# Altium PCB Sensorboard_PCB_layout.pcbdoc
Units mm, origin at the board's own origin, x right, y up, seen from the top; angles counter-clockwise.
Board outline 110.65 x 71.67 mm, 2 copper layers (Top Layer, Bottom Layer); 41 components, 79 nets, 171 pads, 20 vias.
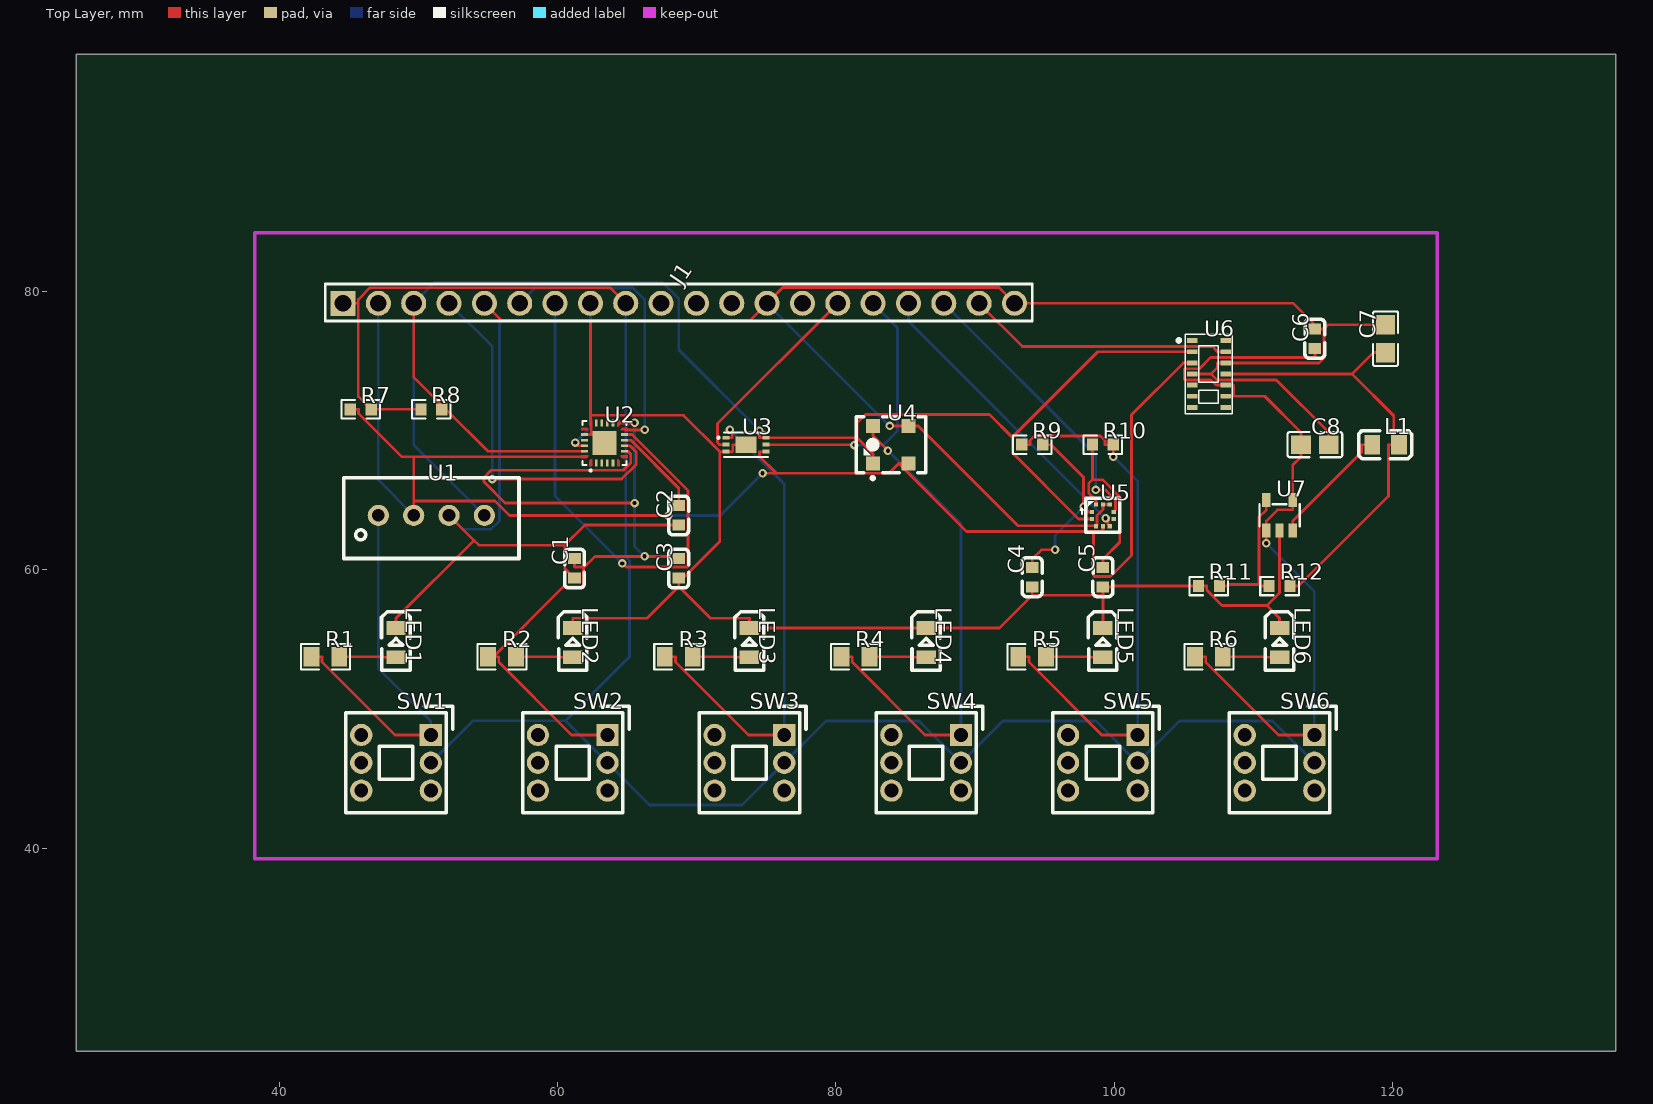
[diagram p0: Top Layer view]
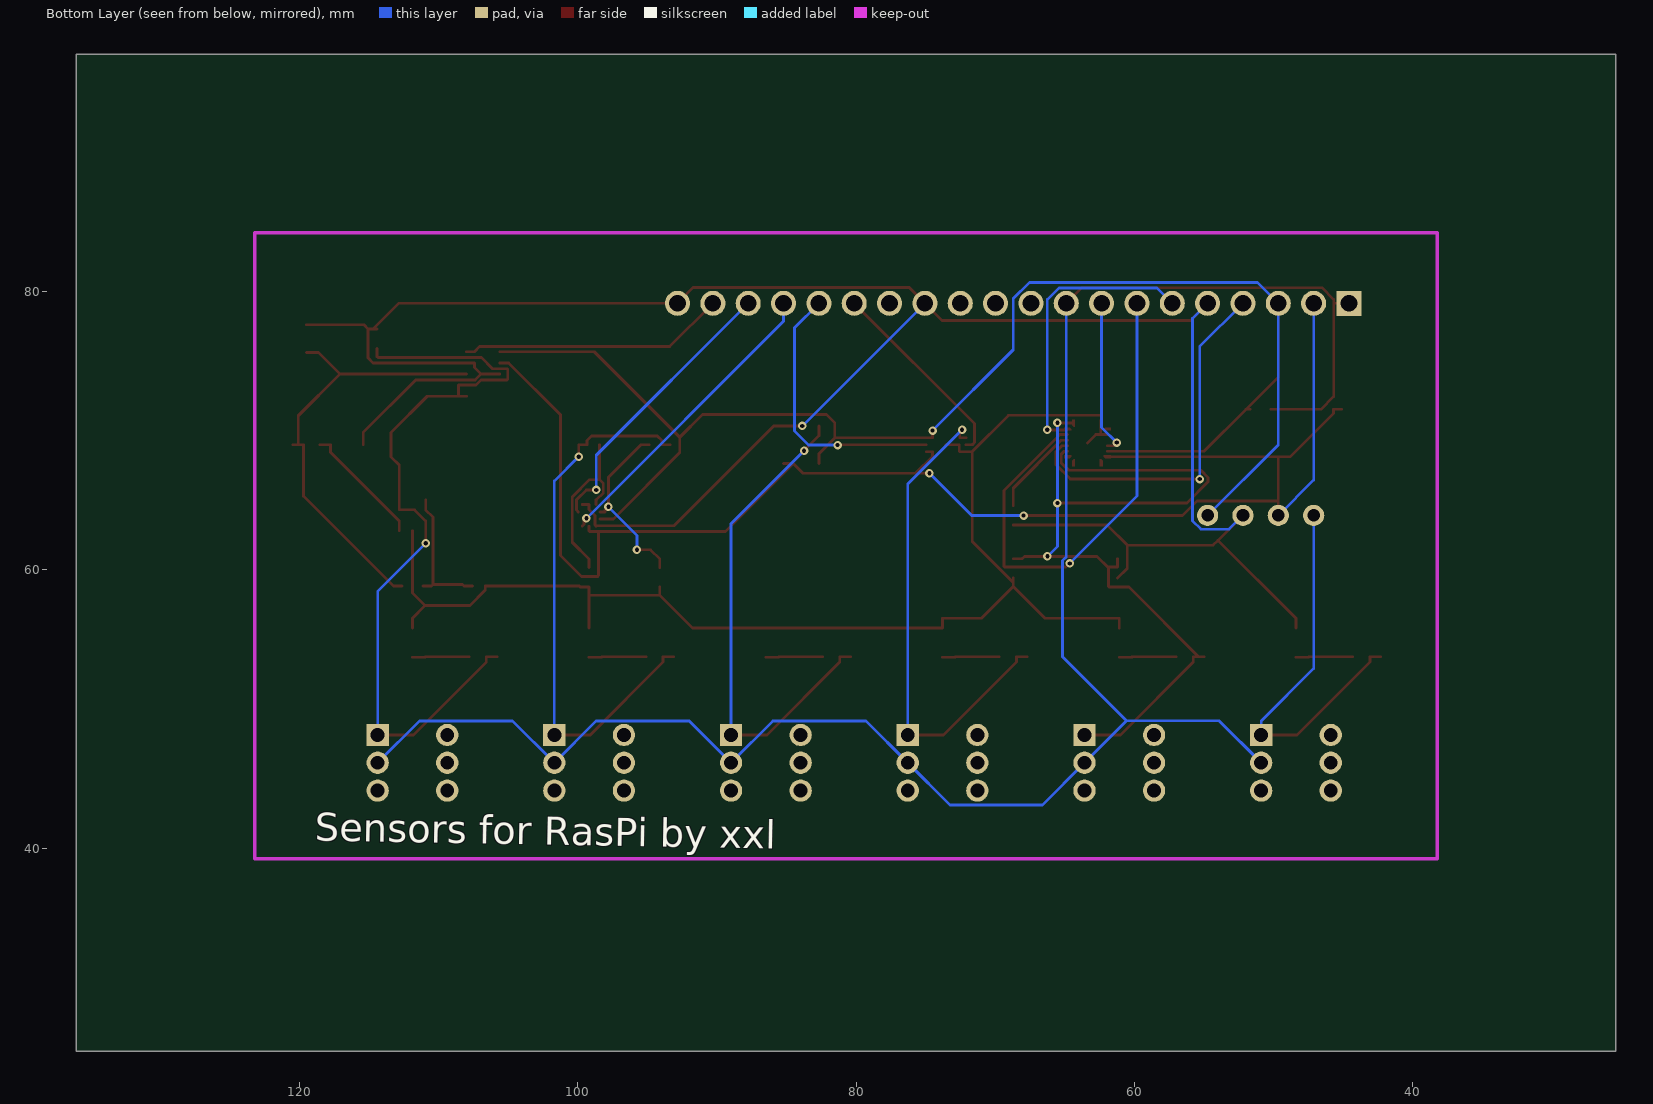
[diagram p1: Bottom Layer view, seen from below]

## Layer stack, top to bottom
Top Layer: signal copper (thickness not stored)
Dielectric: dielectric 0.32, FR-4, Dk 4.8
Bottom Layer: signal copper (thickness not stored)

## Board outline
136.054,25.4 25.4,25.4 25.4,97.072 136.054,97.072

## Components (designator, comment, footprint, x,y, rotation, side; value= is the part's Value field where it differs from the comment)
C1 "100nF" C0603 61.214,60.115 r90 top
C2 "100nF" C0603 68.707,63.925 r90 top
C3 "10nF" C0603 68.707,60.115 r90 top
C4 "100nF" C0603 94.107,59.48 r270 top
C5 "100nF" C0603 99.187,59.48 r270 top
C6 "100nF" C0603 114.427,76.625 r90 top
C7 "10uF" C0805 119.507,76.625 r90 top
C8 "10uF" C0805 114.427,69.005 r180 top
J1 "Header-Male-2.54_1x20" HDR-TH_20P-P2.54-V-M-1 68.707,79.165 r0 top
L1 "2.2uH" L0805 119.507,69.005 r0 top
LED1 "FC-2012HRK-620D" LED0805-R-RD 48.387,54.781 r270 top
LED2 "FC-2012HRK-620D" LED0805-R-RD 61.087,54.781 r270 top
LED3 "FC-2012HRK-620D" LED0805-R-RD 73.787,54.781 r270 top
LED4 "FC-2012HRK-620D" LED0805-R-RD 86.487,54.781 r270 top
LED5 "FC-2012HRK-620D" LED0805-R-RD 99.187,54.781 r270 top
LED6 "FC-2012HRK-620D" LED0805-R-RD 111.887,54.781 r270 top
R1 "68Ω" R0805 43.307,53.765 r0 top
R2 "68Ω" R0805 56.007,53.765 r0 top
R3 "68Ω" R0805 68.707,53.765 r0 top
R4 "68Ω" R0805 81.407,53.765 r0 top
R5 "68Ω" R0805 94.107,53.765 r0 top
R6 "68Ω" R0805 106.807,53.765 r0 top
R7 "3.3kΩ" R0603 45.847,71.545 r0 top
R8 "3.3kΩ" R0603 50.927,71.545 r0 top
R9 "10Ω" R0603 94.107,69.005 r0 top
R10 "10Ω" R0603 99.187,69.005 r0 top
R11 "120kΩ" R0603 106.807,58.845 r0 top
R12 "240kΩ" R0603 111.887,58.845 r0 top
SW1 "XKB7070-Z" SW-TH_6P-L7.0-W7.0-P2.00 48.387,46.145 r0 top
SW2 "XKB7070-Z" SW-TH_6P-L7.0-W7.0-P2.00 61.087,46.145 r0 top
SW3 "XKB7070-Z" SW-TH_6P-L7.0-W7.0-P2.00 73.787,46.145 r0 top
SW4 "XKB7070-Z" SW-TH_6P-L7.0-W7.0-P2.00 86.487,46.145 r0 top
SW5 "XKB7070-Z" SW-TH_6P-L7.0-W7.0-P2.00 99.187,46.145 r0 top
SW6 "XKB7070-Z" SW-TH_6P-L7.0-W7.0-P2.00 111.887,46.145 r0 top
U1 "DHT20" SENSOR-TH_DHT20 50.927,63.925 r0 top
U2 "MPU6500" QFN-24_L3.0-W3.0-P0.40-BL-EP 63.373,69.132 r0 top
U3 "BH1750FVI-TR" WSOF-6_L2.6-W1.6-P0.50-TL-EP 73.533,69.005 r0 top
U4 "AGS10" SENSOR-SMD_AGS10 83.947,69.005 r0 top
U5 "BMP581" LGA-10_L2.0-W2.0-P0.50-TL_BMP581 99.187,63.925 r0 top
U6 "MAX30102EFD+T_C6454833" OESIP-14_L5.6-W3.3-P0.80-TL 106.807,74.085 r0 top
U7 "ZD8028IB5TR" SOT-23-5_L2.9-W1.6-P0.95-LS2.9-BL 111.887,63.925 r0 top

## Footprints (in the part's own frame and the unit in brackets; to place one, negate y for a bottom-side part, rotate by r counter-clockwise, add the part's x,y. Pads: shape width x height; smd on the part's side, far side on the other; paste and mask are expansions set on the pad)
C0603 [mm]
  rect 0.8x0.9 smd paste+0 mask+0.051: 1(-0.7,0) 2(0.7,0)
  silkscreen extent -1.41,-0.71 1.39,0.72
C0805 [mm]
  rect 1.41x1.35 smd paste-100 mask+0.051: 1(-1,0) 2(1,0)
  silkscreen extent -1.96,-0.9 1.96,0.9
HDR-TH_20P-P2.54-V-M-1 [mm]
  rect 1.8x1.8 hole 1.2 paste+0 mask+0.051: 1(-24.13,0)
  round 1.8 hole 1.2 paste+0 mask+0.051: 2(-21.59,0) 3(-19.05,0) 4(-16.51,0) 5(-13.97,0) 6(-11.43,0) 7(-8.89,0) 8(-6.35,0) 9(-3.81,0) 10(-1.27,0) 11(1.27,0) 12(3.81,0) 13(6.35,0) 14(8.89,0) 15(11.43,0) 16(13.97,0) 17(16.51,0) 18(19.05,0) 19(21.59,0) 20(24.13,0)
  silkscreen extent -25.4,-1.27 25.4,1.4
L0805 [mm]
  rect 1.133x1.377 smd paste-100 mask+0.051: 1(-0.966,0) 2(0.966,0)
  silkscreen extent -1.95,-1.02 1.86,1.02
LED0805-R-RD [mm]
  rect 1x1.4 smd paste+0 mask+0.051: 1(1.05,0) 2(-1.05,0)
  silkscreen extent -2.22,-1.04 1.99,1.01
LGA-10_L2.0-W2.0-P0.50-TL_BMP581 [mm]
  rect 0.3x0.3 smd paste+0 mask+0.05: 1(-0.78,0.25) 2(-0.78,-0.25) 3(-0.5,-0.78) 4(0,-0.78) 5(0.5,-0.78) 6(0.78,-0.25) 7(0.78,0.25) 8(0.5,0.78) 9(0,0.78) 10(-0.5,0.78)
  silkscreen extent -1.6,-1.23 1.23,1.23
OESIP-14_L5.6-W3.3-P0.80-TL [mm]
  rect 0.75x0.35 smd paste+0 mask+0.05: 1(-1.2,2.4) 2(-1.2,1.6) 3(-1.2,0.8) 4(-1.2,0) 5(-1.2,-0.8) 6(-1.2,-1.6) 7(-1.2,-2.4) 8(1.2,-2.4) 9(1.2,-1.6) 10(1.2,-0.8) 11(1.2,0) 12(1.2,0.8) 13(1.2,1.6) 14(1.2,2.4)
  silkscreen extent -2.28,-2.86 1.69,2.84
QFN-24_L3.0-W3.0-P0.40-BL-EP [mm]
  rect 0.2x0.505 smd paste-100 mask+0.051: 2(-0.6,-1.427) 3(-0.2,-1.427) 4(0.2,-1.427) 5(0.6,-1.427) 14(0.6,1.428) 15(0.2,1.428) 16(-0.2,1.428) 17(-0.6,1.428)
  rect 0.505x0.2 smd paste-100 mask+0.051: 8(1.427,-0.6) 9(1.427,-0.2) 10(1.427,0.2) 11(1.427,0.6) 20(-1.428,0.6) 21(-1.428,0.2) 22(-1.428,-0.2) 23(-1.428,-0.6)
  rect 1.7x1.7 smd paste-100 mask+0.051: 25(0,0)
  Top Layer region: -1.1,1.68 -0.9,1.68 -0.9,1.175 -1,1.174 -1.1,1.274
  Top Layer region: -1.68,-1.1 -1.274,-1.1 -1.174,-1 -1.175,-0.9 -1.68,-0.9
  Top Layer region: 1.68,-1.1 1.275,-1.1 1.175,-1 1.175,-0.9 1.68,-0.9
  Top Layer region: 1.68,1.1 1.274,1.1 1.174,1 1.175,0.9 1.68,0.9
  Top Layer region: 1.1,1.68 0.9,1.68 0.9,1.175 1,1.174 1.1,1.274
  Top Layer region: -1.1,-1.68 -0.9,-1.68 -0.9,-1.175 -1,-1.174 -1.1,-1.275
  Top Layer region: 1.1,-1.68 0.9,-1.68 0.9,-1.175 1,-1.175 1.1,-1.275
  Top Layer region: -1.68,1.1 -1.274,1.1 -1.174,1 -1.175,0.9 -1.68,0.9
  silkscreen extent -1.58,-2.05 1.58,1.58
R0603 [mm]
  rect 0.806x0.864 smd paste-100 mask+0.051: 1(-0.753,0) 2(0.753,0)
  silkscreen extent -1.39,-0.66 1.39,0.66
R0805 [mm]
  rect 1.133x1.377 smd paste-100 mask+0.051: 1(-1,0) 2(1,0)
  silkscreen extent -1.76,-0.92 1.76,0.92
SENSOR-SMD_AGS10 [mm]
  rect 1x1 smd paste+0 mask+0.05: 1(-1.27,-1.35) 2(1.27,-1.35) 3(1.27,1.35) 4(-1.27,1.35)
  silkscreen extent -2.5,-2.5 2.5,2
SENSOR-TH_DHT20 [mil]
  round 60 hole 36 paste+0 mask+2: 1(-150,0) 2(-50,0) 3(50,0) 4(150,0)
  silkscreen extent -248,-122 248,106
SOT-23-5_L2.9-W1.6-P0.95-LS2.9-BL [mm]
  rect 0.6x1 smd paste+0 mask+0.05: 1(-0.95,-1.1) 2(0,-1.1) 3(0.95,-1.1) 4(0.95,1.1) 5(-0.95,1.1)
  silkscreen extent -1.45,-0.8 1.45,0.8
SW-TH_6P-L7.0-W7.0-P2.00 [mm]
  rect 1.6x1.6 hole 1 paste+0 mask+0.051: 1(2.5,2)
  round 1.6 hole 1 paste+0 mask+0.051: 2(2.5,0) 3(2.5,-2) 4(-2.5,2) 5(-2.5,0) 6(-2.5,-2)
  silkscreen extent -3.6,-3.6 4.06,4.06
WSOF-6_L2.6-W1.6-P0.50-TL-EP [mm]
  rect 0.505x0.28 smd paste+0 mask+0.051: 1(-1.428,0.5) 2(-1.428,0) 3(-1.428,-0.5) 4(1.427,-0.5) 5(1.427,0) 6(1.427,0.5)
  rect 1.5x1.2 smd paste+0 mask+0.051: 7(0,0)
  silkscreen extent -2.05,-0.88 1.58,0.88

## Via types
v1: diameter 0.61, hole 0.305, Top Layer to Bottom Layer, tented both sides, 20 vias

## Nets (pads, with @x,y where several pads share a name; then routed paths per layer and width w, separated by ;. In a path a pad name is that pad's centre, name@x,y a point inside that pad or via, vN(x,y) a via of type N, cw(c..) or ccw(c..) an arc to the next point about the centre after c; other vN are vias at no path point)
GND: C1.1 C2.1 C3.1 C4.2 C5.2 C6.2 C7.2 C8.1 J1.5 J1.13 J1.20 LED1.2 LED2.2 LED3.2 LED4.2 LED5.2 LED6.2 R11.1 U1.3 U2.20 U2.25 U3.3 U3.7 U4.3 U5.3 U5.8 U5.9 U6.4 U6.12 U7.2 | length 273.4
  Top Layer w0.2: LED1.2 48.387,56.532 53.988,62.134 ; U1.3 53.988,62.134 ; J1.5 55.971,77.931 62.373,77.931 ; LED2.2 61.087,56.532 66.425,56.532 68.707,58.814 ; C1.1 60.517,60.112 60.517,61.783 ; U2.20 62.422,69.732 ; U2.25 62.773,69.732 62.422,69.732 ; C3.1 C3.1@68.707,59.115 ; C2.1 61.959,63.225 60.517,61.783 ; U3.7 72.582,69.005 72.582,68.529 72.559,68.505 72.332,68.505 72.106,68.505 71.652,68.505 ; v1(83.867,70.355) U4.3 85.568,70.355 85.918,70.355 93.092,63.181 U5.3@98.687,63.181 ; C4.2 94.107,58.179 ; U5.3 U5.3@98.687,63.181 ; LED5.2 99.187,58.179 ; U5.8 99.512,64.705 99.336,64.705 U5.9 99.187,64.354 98.759,63.927 98.759,63.254 U5.3@98.687,63.181 ; U6.4 106.183,74.085 106.951,74.085 106.953,74.087 ; LED6.2 111.887,56.532 110.979,57.441 ; U7.2 111.887,58.349 110.979,57.441 ; C6.2 C6.2@114.715,77.325 ; C8.1 115.427,69.881 111.645,73.662 107.377,73.662 106.953,74.087 ; C7.2 115.381,77.625 115.079,77.324 ; 53.988,62.134 54.339,61.783 60.517,61.783 ; 62.373,71.115 62.373,77.931 ; 62.373,71.115 62.373,70.56 62.422,70.511 62.422,69.732 ; 62.373,71.115 69.042,71.115 71.652,68.505 ; 62.373,77.931 73.823,77.931 J1.13 76.185,80.293 91.709,80.293 J1.20 112.875,79.165 C6.2@114.715,77.325 ; 68.707,58.814 C3.1@68.707,59.115 ; 68.707,58.814 70.989,56.532 73.787,56.532 LED3.2 LED4.2 91.759,55.831 94.107,58.179 ; C3.1@68.707,59.115 71.652,62.06 71.652,68.505 ; 94.107,58.179 99.187,58.179 ; 99.187,58.179 C5.2 99.838,58.78 99.903,58.845 R11.1 106.658,58.845 106.658,58.543 107.76,57.44 110.978,57.44 ; 106.953,74.087 107.431,74.566 107.431,74.885 107.941,74.885 U6.12 114.709,74.885 115.079,75.256 115.079,77.324 ; C6.2@114.715,77.325 115.003,77.325 115.078,77.325 115.079,77.324
  Bottom Layer w0.2: U1.3 53.189,62.933 55.227,62.933 55.816,63.523 55.816,78.086 J1.5 ; J1.13 v1(83.867,70.355)
J1_10: J1.10
J1_11: J1.11
J1_12: J1.12
J1_14: J1.14
J1_19: J1.19 U6.13 | length 19.2
  Top Layer w0.2: J1.19 93.4,76.062 107.054,76.062 107.431,75.685 U6.13
LED1_1: LED1.1 R1.2 | length 4.1
  Top Layer w0.2: R1.2 47.452,53.765 47.487,53.731 LED1.1
R2_2: LED2.1 R2.2 | length 4.1
  Top Layer w0.2: R2.2 60.152,53.765 60.187,53.731 LED2.1
R3_2: LED3.1 R3.2 | length 4.1
  Top Layer w0.2: R3.2 72.852,53.765 72.887,53.731 LED3.1
R4_2: LED4.1 R4.2 | length 4.1
  Top Layer w0.2: R4.2 85.552,53.765 85.587,53.731 LED4.1
R5_2: LED5.1 R5.2 | length 4.1
  Top Layer w0.2: R5.2 98.252,53.765 98.287,53.731 LED5.1
R6_2: LED6.1 R6.2 | length 4.1
  Top Layer w0.2: R6.2 110.952,53.765 110.987,53.731 LED6.1
SW1_2: J1.1 J1.9 R7.2 R8.1 SW1.2 SW2.2 SW3.2 SW4.2 SW5.2 SW6.2 | length 141
  Top Layer w0.2: J1.1 45.678,79.165 ; R8.1 R7.2 45.678,72.468 45.678,79.165 ; J1.9 63.77,80.292 46.53,80.292 45.678,79.44 45.678,79.165
  Bottom Layer w0.2: SW1.2 53.91,49.168 60.564,49.168 ; J1.9 64.897,60.946 65.161,60.682 65.161,53.766 60.564,49.168 ; SW6.2 111.385,49.147 104.689,49.147 SW5.2 98.685,49.147 91.989,49.147 SW4.2 85.985,49.147 79.289,49.147 SW3.2 73.259,43.118 66.614,43.118 SW2.2 60.564,49.168
SW1_3: SW1.3
SW1_4: SW1.4
SW1_5: SW1.5
SW1_6: SW1.6
SW2_3: SW2.3
SW2_4: SW2.4
SW2_5: SW2.5
SW2_6: SW2.6
SW3_3: SW3.3
SW3_4: SW3.4
SW3_5: SW3.5
SW3_6: SW3.6
SW4_3: SW4.3
SW4_4: SW4.4
SW4_5: SW4.5
SW4_6: SW4.6
SW5_1: R5.1 R9.1 R10.2 SW5.1 | length 40.2
  Top Layer w0.2: R5.1 93.874,53.765 93.874,53.382 99.11,48.145 SW5.1 ; R9.1 93.958,69.005 93.958,69.307 94.29,69.639 99.004,69.639 99.336,69.307 99.336,69.005 R10.2 v1(99.94,68.141)
  Bottom Layer w0.2: v1(99.94,68.141) 101.687,66.394 SW5.1
SW5_3: SW5.3
SW5_4: SW5.4
SW5_5: SW5.5
SW5_6: SW5.6
SW6_1: C6.1 C8.2 R6.1 SW6.1 U6.9 U6.10 U7.1 U7.4 | length 58.1
  Top Layer w0.2: R6.1 106.574,53.765 106.574,53.382 111.81,48.145 SW6.1 ; U6.9 108.508,72.485 108.582,72.485 ; v1(110.937,61.916) U7.1 110.937,62.864 110.937,63.526 111.736,64.324 112.837,64.324 112.837,64.675 U7.4 112.837,67.54 113.427,68.13 C8.2 113.427,69.881 110.823,72.485 108.582,72.485 ; C6.1 114.427,75.324 114.365,75.262 106.926,75.262 106.126,74.462 105.088,74.462 105.03,74.404 105.03,73.721 105.088,73.662 106.95,73.662 107.327,73.285 U6.10 108.295,73.285 108.582,73.285 108.582,72.485
  Bottom Layer w0.2: v1(110.937,61.916) 114.387,58.467 SW6.1
SW6_3: SW6.3
SW6_4: SW6.4
SW6_5: SW6.5
SW6_6: SW6.6
U1_1: R1.1 SW1.1 U1.1 | length 28.5
  Top Layer w0.2: R1.1 43.074,53.765 43.074,53.382 48.31,48.145 SW1.1
  Bottom Layer w0.2: U1.1 47.117,52.916 50.887,49.146 SW1.1
U1_2: J1.2 R7.1 U1.2 U3.4 U4.2 U5.4 U6.3 | length 118.6
  Top Layer w0.2: R7.1 45.698,71.545 45.698,71.243 48.809,68.132 49.657,68.132 ; U1.2 49.657,64.964 ; 61.946,68.132 49.657,68.132 ; v1(67.963,63.916) 56.554,63.916 55.506,64.964 49.657,64.964 ; v1(74.727,66.953) 75.719,66.953 ; U3.4@74.96,68.505 74.507,68.505 74.507,68.164 75.719,66.953 ; U4.2 84.516,67.655 ; U5.4 99.187,62.795 99.165,62.772 98.513,62.772 ; U6.3 104.972,74.885 101.242,71.155 101.242,61.044 99.737,59.54 98.571,59.54 98.513,59.598 98.513,62.772 ; 49.657,64.964 49.657,68.132 ; 75.719,66.953 83.814,66.953 84.516,67.655 ; 84.516,67.655 89.399,62.772 98.513,62.772
  Bottom Layer w0.2: J1.2 47.117,66.465 U1.2 ; v1(67.963,63.916) 71.69,63.916 v1(74.727,66.953)
U1_4: J1.3 R8.2 U1.4 U2.23 U3.6 U4.1 U5.2 U6.2 | length 116.8
  Top Layer w0.2: J1.3 49.657,73.87 R8.2@51.982,71.545 ; R8.2 R8.2@51.982,71.545 ; U2.23 54.995,68.532 R8.2@51.982,71.545 ; v1(74.507,70.025) 74.507,69.505 U3.6 81.528,69.505 ; U4.1 82.677,68.356 81.528,69.505 ; U5.2 97.434,63.675 92.674,68.435 92.674,69.539 ; U6.2 98.82,75.685 92.674,69.539 ; 81.528,69.505 81.528,70.566 82.128,71.166 91.047,71.166 92.674,69.539
  Bottom Layer w0.2: U1.4 49.657,69.005 J1.3 51.155,80.663 67.548,80.663 68.707,79.504 68.707,75.825 v1(74.507,70.025)
U2_1: 
U2_2: U2.2
U2_3: U2.3
U2_4: U2.4
U2_5: U2.5
U2_6: 
U2_7: 
U2_8: C1.2 C3.2 R2.1 SW2.1 U2.8 | length 64.6
  Top Layer w0.2: R2.1 R2.1@55.391,53.765 ; C1.2 61.214,60.214 61.815,60.214 61.866,60.163 ; SW2.1 61.01,48.145 55.774,53.382 55.774,53.765 R2.1@55.391,53.765 ; 64.373,70.56 65.513,70.56 v1(65.532,70.578) ; U2.8 65.038,68.532 65.255,68.315 65.255,67.698 64.722,67.165 55.212,67.165 54.701,66.653 54.701,66.339 56.229,64.811 v1(65.532,64.811) ; C3.2 68.056,60.815 67.892,60.979 v1(66.254,60.979) 62.683,60.979 61.866,60.163 ; R2.1@55.391,53.765 60.395,58.77 61.808,58.77 61.866,58.828 61.866,60.163
  Bottom Layer w0.2: v1(65.532,70.578) v1(65.532,64.811) 65.532,61.701 v1(66.254,60.979)
U2_9: J1.4 U2.9 | length 26.6
  Top Layer w0.2: v1(55.31,66.533) 64.605,66.533 65.654,67.582 65.654,68.494 65.216,68.932 U2.9
  Bottom Layer w0.2: J1.4 55.31,76.053 v1(55.31,66.533)
U2_10: C2.2 U2.10 | length 6.6
  Top Layer w0.2: U2.10 65.254,69.332 68.707,65.879 C2.2
U2_11: J1.7 U2.11 | length 37.2
  Top Layer w0.2: v1(64.654,60.472) 64.914,60.213 69.319,60.213 69.378,60.271 69.378,65.712 65.358,69.732 U2.11
  Bottom Layer w0.2: J1.7 59.817,65.309 v1(64.654,60.472)
U2_12: J1.6 | length 20.6
  Top Layer w0.2: 64.8,70.132 64.861,70.071 v1(66.259,70.071)
  Bottom Layer w0.2: J1.6 58.379,80.267 65.425,80.267 66.259,79.433 v1(66.259,70.071)
U2_14: U2.14
U2_15: U2.15
U2_16: U2.16
U2_17: U2.17
U2_19: 
U2_21: U2.21
U2_22: J1.8 U2.22 | length 11.2
  Top Layer w0.2: v1(61.269,69.155) 61.492,68.932 U2.22
  Bottom Layer w0.2: v1(61.269,69.155) 62.357,70.243 J1.8
U3_1: R3.1 SW3.1 U3.1 | length 35.8
  Top Layer w0.2: R3.1 68.474,53.765 68.474,53.382 73.71,48.145 SW3.1 ; U3.1 72.559,69.505 72.559,69.907 v1(72.389,70.077)
  Bottom Layer w0.2: v1(72.389,70.077) 76.287,66.179 76.287,49.146 SW3.1
U3_2: J1.15 U3.2 | length 14.3
  Top Layer w0.2: U3.2 71.652,69.005 71.494,69.163 71.494,70.522 J1.15
U3_5: J1.16 U3.5 | length 19.8
  Top Layer w0.2: U3.5 81.306,69.005 v1(81.331,68.98)
  Bottom Layer w0.2: v1(81.331,68.98) 83.432,68.98 84.434,69.982 84.434,77.408 J1.16
U4_4: R4.1 SW4.1 U4.4 | length 36
  Top Layer w0.2: R4.1 81.174,53.765 81.174,53.382 86.41,48.145 SW4.1 ; U4.4 82.677,69.654 83.738,68.593 v1(83.738,68.57)
  Bottom Layer w0.2: v1(83.738,68.57) 88.987,63.321 SW4.1
U5_1: C4.1 R9.2 U5.1 | length 13.3
  Top Layer w0.2: C4.1 94.107,60.781 94.777,61.451 v1(95.752,61.451) ; R9.2 95.464,69.005 97.804,66.665 v1(97.804,64.541) 98.056,64.289 98.056,64.175 U5.1
  Bottom Layer w0.2: v1(95.752,61.451) 95.752,62.488 v1(97.804,64.541)
U5_5: J1.17 U5.5 | length 22
  Top Layer w0.2: v1(99.38,63.715) 99.561,63.533 99.561,63.271 U5.5
  Bottom Layer w0.2: J1.17 85.217,77.877 v1(99.38,63.715)
U5_6: U5.6
U5_7: J1.18 U5.7 | length 20.6
  Top Layer w0.2: v1(98.675,65.751) 99.388,65.751 100.094,65.045 100.094,64.302 U5.7
  Bottom Layer w0.2: J1.18 98.675,68.247 v1(98.675,65.751)
U5_10: C5.1 R10.1 U5.10 | length 12.7
  Top Layer w0.2: R10.1 98.434,68.372 98.434,66.493 ; U5.10 98.687,65.056 98.654,65.056 98.168,65.541 98.168,66.227 98.434,66.493 ; C5.1 99.187,60.781 100.402,61.996 100.402,65.251 99.161,66.493 98.434,66.493
U6_1: U6.1
U6_5: U6.5
U6_6: U6.6
U6_7: U6.7
U6_8: U6.8
U6_11: C7.1 L1.2 R12.2 U6.11 | length 32.7
  Top Layer w0.2: U6.11 117.091,74.085 ; R12.2 113.244,58.845 119.706,65.307 119.706,69.005 L1.2@120.09,69.005 ; C7.1 118.631,75.625 117.091,74.085 ; L1.2 L1.2@120.09,69.005 ; 117.091,74.085 120.09,71.087 L1.2@120.09,69.005
U6_14: U6.14
U7_3: L1.1 U7.3 | length 9
  Top Layer w0.2: U7.3 112.837,63.526 117.774,68.462 117.774,69.005 L1.1
U7_5: R11.2 R12.1 U7.5 | length 10
  Top Layer w0.2: R11.2 108.164,58.845 108.283,58.964 110.411,58.964 ; U7.5 110.937,64.324 110.411,63.798 110.411,58.964 ; R12.1 110.53,58.845 110.411,58.964

## Silkscreen, mask and mechanical layers (free items; w line width, h text height)
Bottom Overlay:
  text "Sensors for RasPi by xxl" at 118.89,40.557 h2.03 r1